# Altium PCB SL-DPT100.PcbDoc (part 2 of 3)
Units mm, origin at the board's own origin, x right, y up, seen from the top; angles counter-clockwise.
Board outline 82 x 97 mm, 4 copper layers (Top Layer, VCC, GND, Bottom Layer); 177 components, 169 nets, 599 pads, 430 vias.
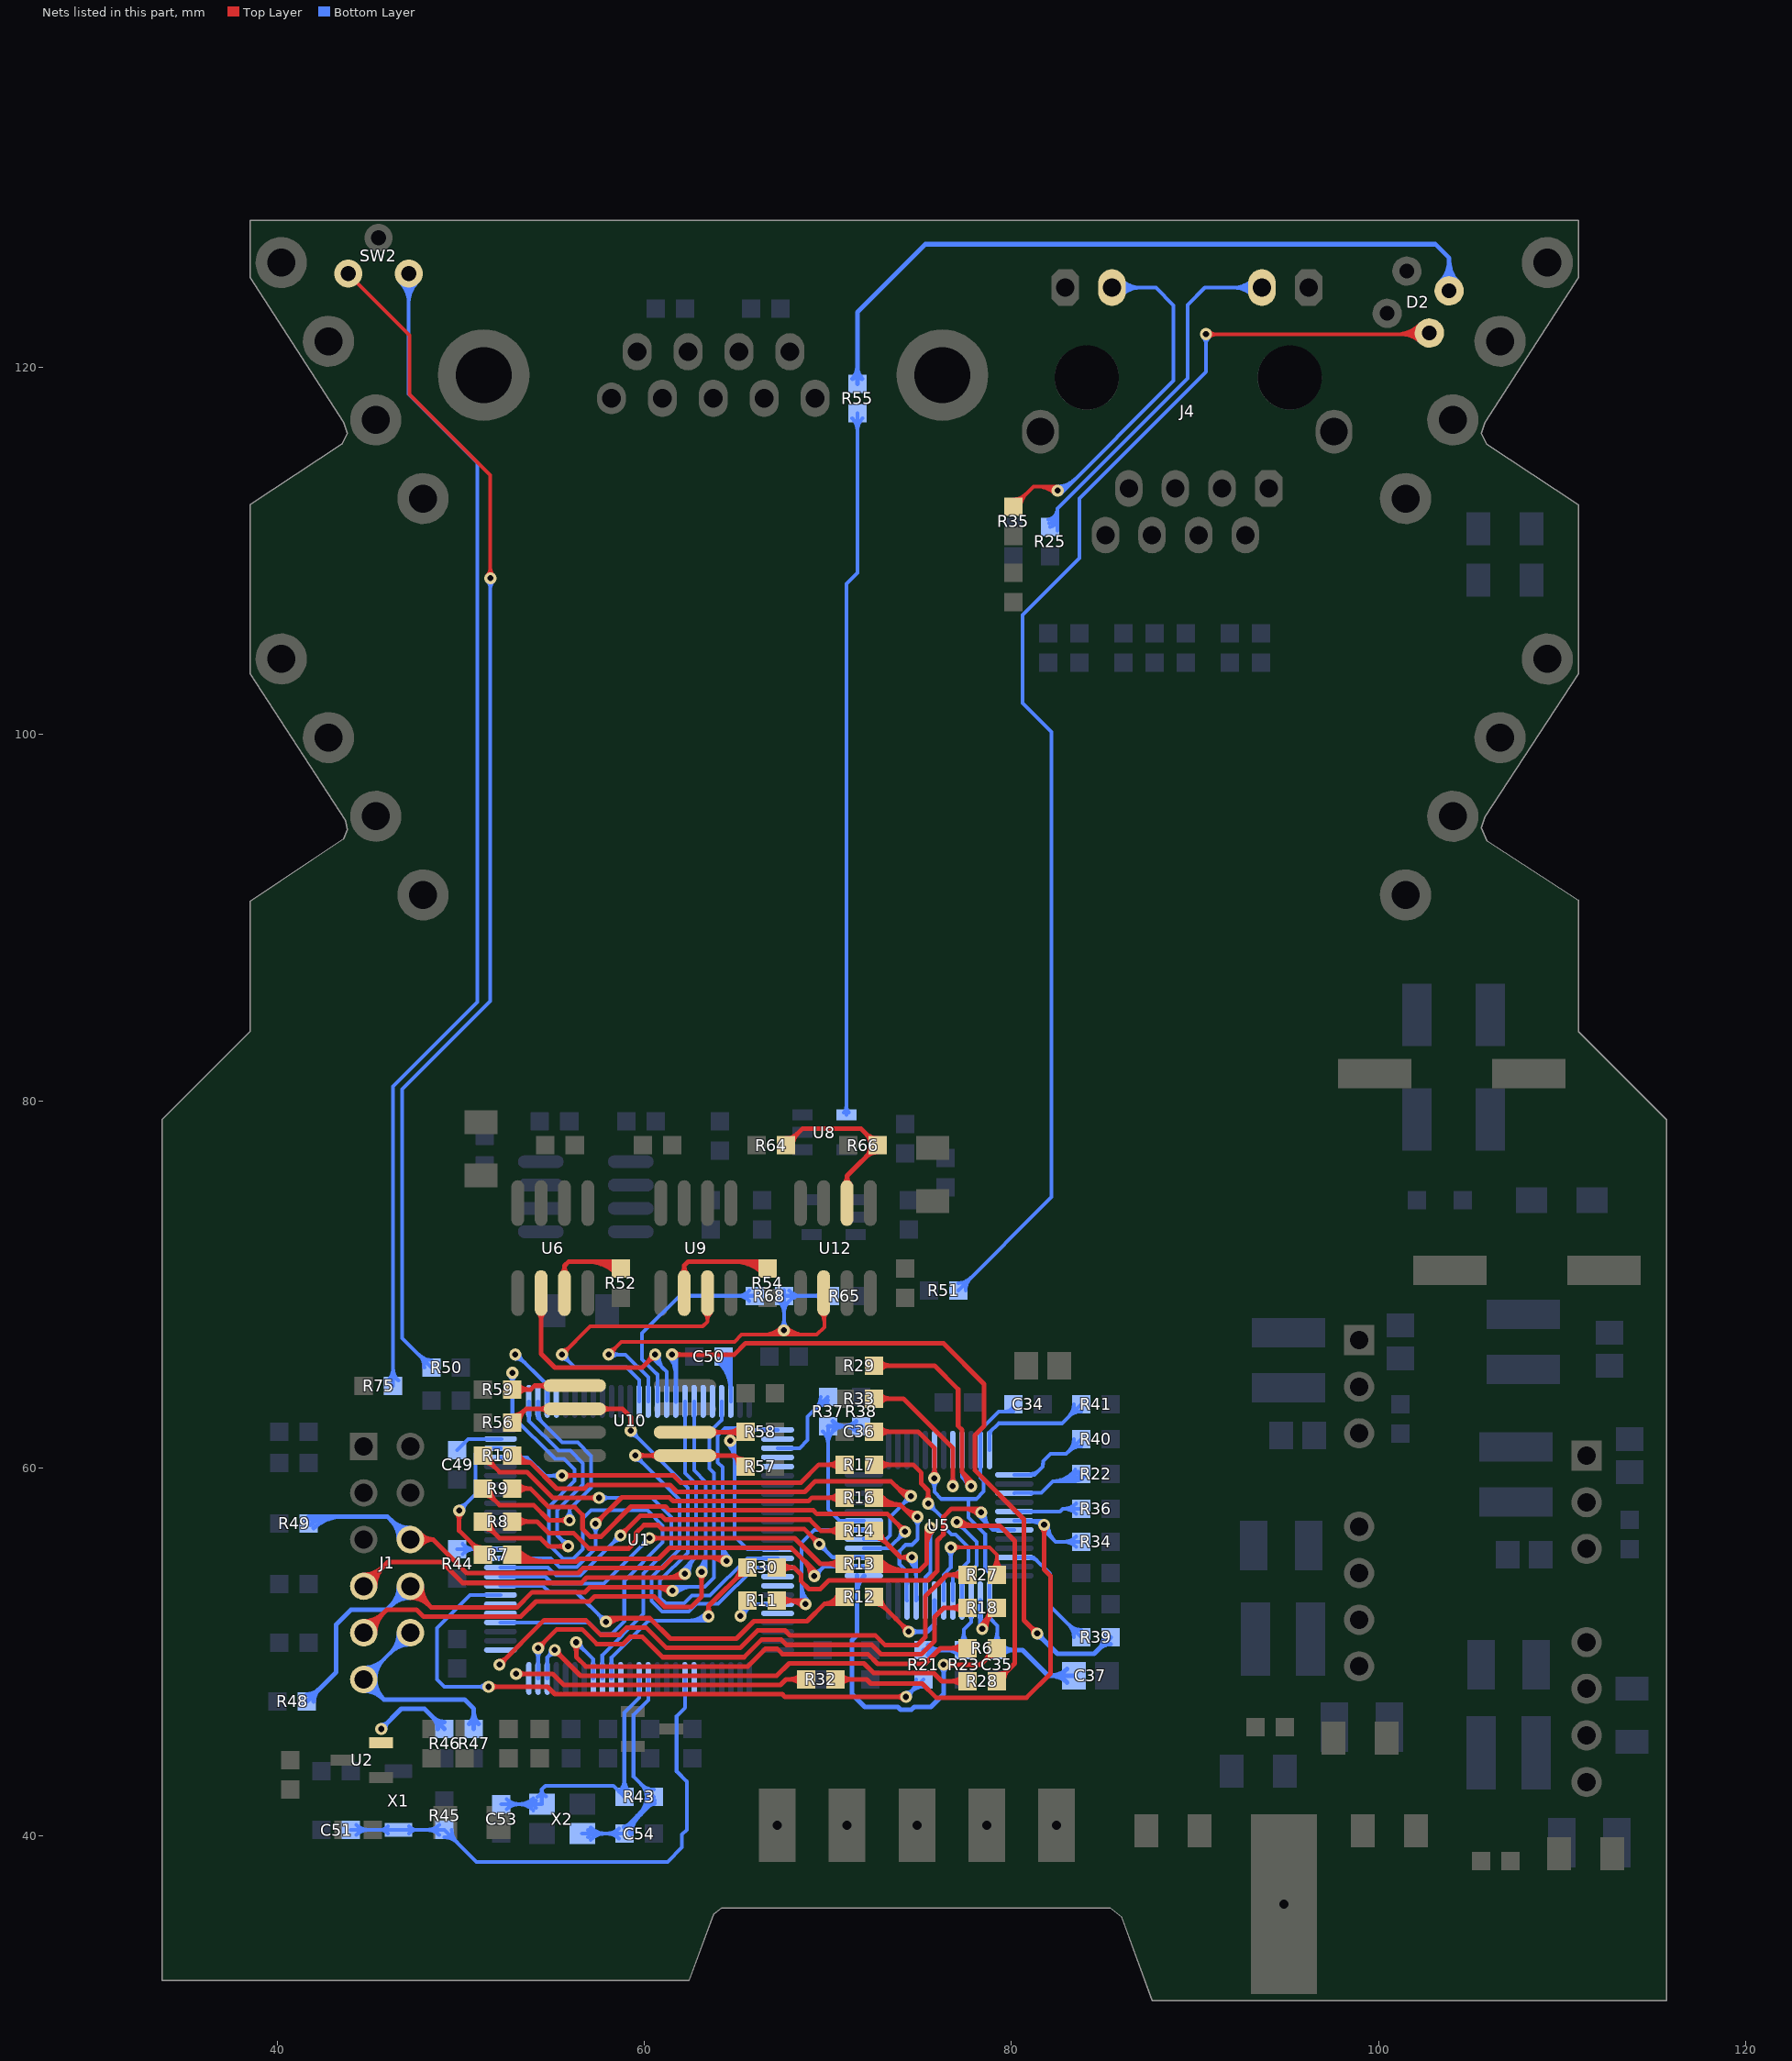
[diagram p4: the nets of this part, all layers, seen from the top]

## Via types
v1: diameter 0.66, hole 0.33, Top Layer to Bottom Layer, tented both sides, 430 vias

## Nets (pads, with @x,y where several pads share a name; then routed paths per layer and width w, separated by ;. In a path a pad name is that pad's centre, name@x,y a point inside that pad or via, vN(x,y) a via of type N, cw(c..) or ccw(c..) an arc to the next point about the centre after c; other vN are vias at no path point) (continued)
NetC34_2: C34.2 C35.2 C36.2 C37.1 U5.18 U5.23 U5.37 | length 39.2
  Top Layer w0.254: C36.2@72.5,62 74.9,62 75.8,61.1 v1@75.8,59.4 ; C36.2@72.764,61.736 cw(c73.4,61.1) 73.4,62 cw(c73.4,62.9) C36.2@72.764,62.264 ; v1@75.652,59.605 ccw(c75.294,59.963) 75.8,59.963 ; 75.8,59.941 ccw(c76.276,59.941) v1@75.939,59.605
  Bottom Layer w0.203: v1@75.634,59.3 cw(c75.233,58.899) 75.8,58.899 ; v1@75.638,59.612 ccw(c75.248,60.002) 75.8,60.002 ccw(c76.352,60.002) v1@75.962,59.612 ; 75.8,58.92 cw(c76.337,58.92) v1@75.957,59.3 ; U5.18@75.8,61 75.8,59.45 75.8,58.71 76.18,58.33 78.069,58.33 78.482,58.743 78.482,59.308 78.3,59.49 U5.23@78.3,61 78.3,62.1 79.3,63.1 C34.2@80.1,63.1 ; 77.66,58.3 77.66,57.318 78.564,56.414 78.564,54.536 78.798,54.302 78.798,52.802 U5.37@78.8,52.8 ; U5.37@78.815,51.835 79.225,51.425 C35.2@79.225,50.2 ; U5.37@78.848,51.9 ccw(c79.086,51.9) 78.918,51.732 ; C35.2@78.918,50.382 ccw(c78.178,51.122) 79.225,51.122 ; C35.2@79.062,50.238 ccw(c78.668,50.632) 79.225,50.632 ; 79.225,51.001 ccw(c80.101,51.001) C35.2@79.482,50.382 ; C34.2@79.707,63.1 ccw(c79.707,63.501) C34.2@80.108,63.5
  Bottom Layer w0.254: C35.2@79,50.1 C35.2@79.2,50.1 80.6,50.1 82,48.7 C37.1@83.4,48.7 ; C35.2@79.464,49.836 cw(c80.1,49.2) 80.1,50.1 cw(c80.1,51) C35.2@79.464,50.364 ; C37.1@83.03,48.33 ccw(c82.137,47.437) 82.137,48.7 ccw(c82.137,49.963) C37.1@83.03,49.07
  other v1: 75.796,59.461
NetC49_1: C49.1 U1.49 | length 2.6
  Bottom Layer w0.203: C49.1@49.8,61 50.4,61.6 U1.49@52.2,61.6
NetC50_1: C50.1 U1.73 | length 7.4
  Bottom Layer w0.203: C50.1@64.02,65.818 cw(c62.379,64.177) U1.73@64.7,64.177 ; C50.1@64.164,65.962 cw(c62.87,64.668) 64.7,64.668 ; C50.1@64.308,66.106 cw(c63.36,65.158) 64.7,65.158 ; C50.1@64.451,66.249 cw(c63.851,65.649) C50.1@64.7,65.649 ; U1.73@64.7,63.65 C50.1@64.7,66.1
NetD2_2: D2.2 R55.2 | length 45.3
  Bottom Layer w0.254: R55.2@71.336,119.364 ccw(c70.7,120) 71.6,120 ccw(c72.5,120) R55.2@71.864,119.364 ; R55.2@71.6,119.1 71.6,123 75.3,126.7 103.1,126.7 103.851,125.949 D2.2@103.851,124.163 ; D2.2@103.375,124.639 ccw(c102.226,125.788) 103.851,125.788 ccw(c105.476,125.788) D2.2@104.327,124.639 ; D2.2@103.555,124.46 ccw(c102.839,125.175) 103.851,125.175 ccw(c104.863,125.175) D2.2@104.147,124.46
NetD2_4: D2.4 R51.2 | length 79.7
  Top Layer w0.203: v1@90.6,121.783 102.699,121.783 D2.4@102.778,121.861 ; v1@90.762,121.638 cw(c91.111,121.289) 91.111,121.783 ; v1@90.762,121.962 ccw(c91.193,122.393) 91.193,121.783 ; 100.903,121.783 ccw(c100.903,123.736) D2.4@102.284,122.355 ; 101.28,121.783 cw(c101.28,120.364) D2.4@102.284,121.367 ; 101.393,121.783 ccw(c101.393,123.245) D2.4@102.427,122.211 ; 101.771,121.783 cw(c101.771,120.854) D2.4@102.427,121.511 ; 101.884,121.783 ccw(c101.884,122.755) D2.4@102.571,122.068
  Bottom Layer w0.203: R51.2@77.1,69.7 82.182,74.782 82.182,100.118 80.6,101.7 80.6,106.5 83.7,109.6 83.7,112.854 90.6,119.754 v1(90.6,121.8) ; R51.2@77.1,70.098 ccw(c77.1,71.06) 77.78,70.38 ccw(c78.46,69.7) R51.2@77.498,69.7 ; v1@90.438,121.638 cw(c90.048,121.248) 90.6,121.248 cw(c91.152,121.248) v1@90.762,121.638
NetD5_2: 
NetJ1_10: J1.10 J1.11 R47.1 | length 24.8
  Bottom Layer w0.203: J1.11@44.7,48.5 J1.10@47.2,51 ; J1.11@44.7,48.945 ccw(c44.7,50.02) 45.46,49.26 ccw(c46.22,48.5) J1.11@45.145,48.5 ; J1.11@44.7,49.148 ccw(c44.7,50.714) 45.807,49.607 ccw(c46.914,48.5) J1.11@45.348,48.5 ; J1.10@46.592,51.04 cw(c45.026,51.04) 46.133,49.933 cw(c47.24,48.826) J1.10@47.24,50.392 ; J1.10@46.795,51.04 cw(c45.72,51.04) 46.48,50.28 cw(c47.24,49.52) J1.10@47.24,50.595
  Bottom Layer w0.254: J1.11@44.7,47.877 cw(c44.7,46.373) 45.764,47.436 cw(c46.827,48.5) J1.11@45.323,48.5 ; J1.11@44.7,48.131 cw(c44.7,47.24) 45.33,47.87 cw(c45.96,48.5) J1.11@45.069,48.5 ; J1.11@44.7,48.5 45.8,47.4 50.2,47.4 50.7,46.9 R47.1@50.7,45.8 ; R47.1@50.436,46.064 ccw(c49.799,46.7) 50.7,46.7 ccw(c51.6,46.7) R47.1@50.964,46.064
NetJ4_10: J4.10 R25.1 | length 26.1
  Bottom Layer w0.203: R25.1@82.014,111.689 ccw(c81.879,112.295) 82.5,112.295 ; R25.1@82.058,111.491 ccw(c81.936,112.042) 82.5,112.042 ; R25.1@82.102,111.292 ccw(c81.992,111.788) R25.1@82.5,111.788 ; R25.1@82.5,111.1 82.5,112.295 ; J4.10@93.187,123.876 ccw(c92.08,122.77) 92.08,124.335 ccw(c92.08,125.9) J4.10@93.187,124.793 ; J4.10@93.33,124.02 ccw(c92.57,123.26) 92.57,124.335 ccw(c92.57,125.41) J4.10@93.33,124.65 ; J4.10@93.645,124.335 90.535,124.335 89.6,123.4 89.6,119.395 82.5,112.295
NetJ4_11: J4.11 R35.1 | length 28.5
  Top Layer w0.203: R35.1@80.1,112.4 81.2,113.5 v1@82.525,113.5 ; R35.1@80.1,112.798 ccw(c80.1,113.76) 80.78,113.08 ccw(c81.46,112.4) R35.1@80.498,112.4 ; 81.42,113.5 cw(c81.42,112.18) v1@82.353,113.113 ; 81.91,113.5 cw(c81.91,112.67) v1@82.497,113.257
  Bottom Layer w0.203: v1@82.515,113.3 ccw(c82.515,114.144) 83.112,113.548 ; v1@82.515,113.504 ccw(c82.515,114.838) 83.459,113.894 ; v1@82.67,113.105 88.83,119.265 88.83,123.37 87.865,124.335 J4.11@85.475,124.335 ; J4.11@85.79,124.02 cw(c86.55,123.26) 86.55,124.335 cw(c86.55,125.41) J4.11@85.79,124.65 ; J4.11@85.934,123.876 cw(c87.041,122.77) 87.041,124.335 cw(c87.041,125.9) J4.11@85.934,124.793
  other v1: 82.515,113.275
NetR6_1: R6.1 U5.1 | length 21.2
  Top Layer w0.254: v1(76.3,49.3) 78.3,49.3 R6.1@79.2,50.2 ; v1@76.444,49.156 cw(c76.791,48.809) 76.791,49.3 cw(c76.791,49.791) v1@76.444,49.444 ; R6.1@78.827,50.2 cw(c77.927,50.2) 78.563,49.563 cw(c79.2,48.927) R6.1@79.2,49.827
  Bottom Layer w0.254: 71.575,53.189 cw(c72.911,53.189) U5.1@71.966,54.134 ; U5.1@71.575,54.169 71.575,50.908 71.3,50.633 71.3,47.7 72,47 73.8,47 73.957,46.843 74.543,46.843 74.7,47 75.6,47 76.3,47.7 v1(76.3,49.3) ; v1@76.156,49.156 cw(c75.809,48.809) 76.3,48.809 cw(c76.791,48.809) v1@76.444,49.156
NetR7_1: R7.1 U5.2 | length 26.4
  Top Layer w0.254: R7.1@52.705,55.205 ccw(c53.391,55.891) 53.391,54.92 ; R7.1@52.81,54.93 52.82,54.92 56.29,54.92 56.441,55.071 60.758,55.071 61.362,55.675 67.993,55.675 v1@69.402,54.266 ; R7.1@52.884,55.384 ccw(c54.005,56.505) 54.005,54.92 ; R7.1@53.064,55.564 ccw(c54.618,57.118) 54.618,54.92 ; 68.704,54.964 cw(c67.867,54.128) v1@69.05,54.128 ; 69.137,54.531 cw(c68.734,54.128) v1@69.304,54.128
  Bottom Layer w0.203: v1@69.25,54.125 69.782,54.657 U5.2@71.946,54.657 ; v1@69.253,54.356 ccw(c69.253,54.906) 69.642,54.517 ; v1@69.482,54.128 cw(c70.036,54.128) 69.644,54.519
  other v1: 69.253,54.128
NetR8_1: R8.1 U5.3 | length 24.3
  Top Layer w0.254: R8.1@52.8,57.1 54.144,57.1 54.784,56.46 56.147,56.46 56.974,55.633 59.133,55.633 59.54,56.04 59.54,56.475 59.972,56.907 60.725,56.907 60.93,56.703 68.697,56.703 v1(69.525,55.875) ; R8.1@53.064,56.836 cw(c53.7,56.199) 53.7,57.1 cw(c53.7,58) R8.1@53.064,57.364 ; v1@69.322,55.875 ccw(c68.831,55.875) 69.178,56.222 ccw(c69.525,56.569) v1@69.525,56.078
  Bottom Layer w0.203: v1@69.521,55.882 69.521,55.879 70.243,55.157 U5.3@71.946,55.157 ; v1@69.525,55.646 cw(c69.525,55.095) 69.915,55.485 cw(c70.305,55.875) v1@69.754,55.875
NetR9_1: R9.1 U5.4 | length 29.9
  Top Layer w0.254: R9.1@52.8,58.9 53.774,58.9 54.79,57.885 56.2,57.885 56.623,57.462 56.623,56.697 57.037,56.283 57.633,56.283 59.265,57.915 61.143,57.915 61.347,57.711 69.202,57.711 69.401,57.512 73.238,57.512 v1(74.2,56.55) ; R9.1@53.064,58.636 cw(c53.7,57.999) 53.7,58.9 cw(c53.7,59.8) R9.1@53.064,59.164 ; v1@73.997,56.55 ccw(c73.506,56.55) 73.853,56.897 ccw(c74.2,57.244) v1@74.2,56.753
  Bottom Layer w0.203: U5.4@71.95,55.65 73.316,55.65 v1@74.22,56.555 ; 73.798,56.133 ccw(c73.381,56.55) v1@73.971,56.55 ; 73.837,56.171 cw(c74.2,55.808) v1@74.2,56.321
NetR10_1: R10.1 U5.5 | length 30.9
  Top Layer w0.254: R10.1@52.873,60.327 53.773,60.327 ; R10.1@52.915,60.731 ccw(c53.442,60.872) 53.442,60.327 ; R10.1@53.16,60.797 ccw(c53.773,60.962) 53.773,60.327 ; 73.682,59.038 ccw(c74.515,59.872) v1@74.515,58.693 ; 74.115,58.605 ccw(c74.515,59.005) v1@74.515,58.439 ; v1@74.38,58.34 73.42,59.3 69.313,59.3 68.732,58.719 61.765,58.719 61.384,59.099 56.919,59.099 56.713,58.893 55.207,58.893 53.773,60.327
  Bottom Layer w0.203: U5.5@71.95,56.15 73.175,56.15 73.372,56.347 73.372,57.342 v1@74.52,58.49 ; 74.121,58.091 ccw(c73.722,58.49) v1@74.286,58.49 ; 74.133,58.103 cw(c74.515,57.722) v1@74.515,58.261
  other v1: 74.515,58.49
NetR11_1: R11.1 U5.6 | length 13.1
  Top Layer w0.254: R11.1@67.2,52.8 v1@68.8,52.8 ; R11.1@67.464,52.536 cw(c68.101,51.899) 68.101,52.8 cw(c68.1,53.7) R11.1@67.464,53.064 ; 67.802,52.8 cw(c67.802,51.627) v1@68.631,52.456 ; 68.415,52.8 cw(c68.415,52.24) v1@68.811,52.636
  Bottom Layer w0.203: v1@68.55,52.575 68.55,55.95 69.25,56.65 U5.6@71.95,56.65 ; 68.55,53.205 ccw(c69.379,53.205) v1@68.793,52.618 ; 68.55,53.695 ccw(c69.87,53.695) v1@68.937,52.762
  other v1: 68.775,52.6
NetR12_1: R12.1 U5.43 | length 9.9
  Top Layer w0.254: R12.1@72.5,53 73.693,51.807 v1(74.4,51.1) ; 74.053,51.447 cw(c73.706,51.1) v1@74.197,51.1 ; 74.053,51.447 ccw(c74.4,51.793) v1@74.4,51.303 ; 73.137,52.363 cw(c73.774,53) 72.873,53 ccw(c73.774,53) 73.137,52.363 ; 73.137,52.363 ccw(c72.5,51.727) 72.5,52.627 cw(c72.5,51.727) 73.137,52.363
  Bottom Layer w0.254: v1(74.4,51.1) 75.4,51.1 75.8,51.5 U5.43@75.8,52.8 ; v1@74.544,50.956 cw(c74.891,50.609) 74.891,51.1 cw(c74.891,51.591) v1@74.544,51.244
NetR13_1: R13.1 U5.44 | length 15.1
  Top Layer w0.254: R13.1@72.405,54.705 ccw(c73.075,55.375) 73.075,54.427 ; R13.1@72.5,54.428 72.502,54.427 74.978,54.427 75.372,54.821 v1@75.372,56.793 ; R13.1@72.584,54.884 ccw(c73.688,55.988) 73.688,54.427 ; R13.1@72.764,55.064 ccw(c74.301,56.601) 74.301,54.427 ; 75.372,55.794 cw(c76.556,55.794) v1@75.719,56.631 ; 75.372,56.408 cw(c75.942,56.408) v1@75.539,56.811
  Bottom Layer w0.203: U5.44@75.3,52.8 75.303,52.803 75.303,54.078 75.575,54.35 v1@75.575,56.85 ; v1@75.413,56.613 cw(c75.023,56.223) 75.575,56.223 cw(c76.127,56.223) v1@75.737,56.613
  other v1: 75.575,56.775
NetR14_1: R14.1 U5.45 | length 9.7
  Top Layer w0.254: R14.1@72.5,56.227 cw(c72.5,55.327) 73.137,55.963 cw(c73.773,56.6) R14.1@72.873,56.6 ; R14.1@72.5,56.6 73.95,55.15 v1(74.575,55.15) ; v1@74.431,55.006 ccw(c74.084,54.659) 74.084,55.15 ccw(c74.084,55.641) v1@74.431,55.294
  Bottom Layer w0.203: v1@74.413,54.988 cw(c73.48,54.055) 74.8,54.055 ; v1@74.557,55.132 cw(c73.97,54.545) 74.8,54.545 ; U5.45@74.8,53.37 U5.45@74.8,52.8 ; v1@74.8,55.175 U5.45@74.8,52.8 ; U5.45@74.848,52.989 74.847,52.988 74.847,52.847 U5.45@74.8,52.8
NetR16_1: R16.1 U5.46 | length 13.1
  Top Layer w0.254: R16.1@72.389,58.323 ccw(c72.953,58.713) R16.1@72.953,58.027 ; R16.1@72.598,58.468 ccw(c73.437,59.047) 73.437,58.027 ; R16.1@72.603,58.027 73.921,58.027 v1@74.736,57.212 ; R16.1@72.807,58.612 ccw(c73.921,59.38) 73.921,58.027 ; 74.065,57.883 ccw(c74.839,58.658) v1@74.869,57.563 ; 74.482,57.466 ccw(c74.861,57.846) v1@74.876,57.309
  Bottom Layer w0.203: 74.273,53.883 ccw(c74.483,53.883) U5.46@74.334,53.734 ; U5.46@74.3,52.8 74.273,52.827 74.273,54.383 73.893,54.763 73.893,55.493 74.232,55.832 74.582,55.832 74.882,56.132 v1@74.882,57.368 ; v1@74.713,57.198 cw(c74.307,56.792) 74.882,56.792 ; 74.882,56.825 cw(c75.41,56.825) v1@75.037,57.198
  other v1: 74.875,57.36
NetR17_1: R17.1 U5.41 | length 14.3
  Top Layer w0.254: R17.1@72.5,60.2 73.6,60.2 74.64,60.2 75.088,59.752 75.088,59.168 75.46,58.797 v1@75.46,58.09 ; R17.1@72.764,59.936 cw(c73.4,59.3) 73.4,60.2 cw(c73.4,61.101) R17.1@72.764,60.464 ; v1@75.316,58.229 ccw(c74.969,58.576) 75.46,58.576 ccw(c75.951,58.576) v1@75.604,58.229
  Bottom Layer w0.203: v1@75.46,57.856 cw(c75.46,57.317) 75.842,57.698 ; v1@75.46,58.08 76.257,57.283 76.257,56.863 76.736,56.384 76.96,56.384 77.657,55.687 77.657,54.916 76.8,54.059 U5.41@76.8,52.8 ; v1@75.689,58.085 ccw(c76.253,58.085) 75.854,57.686
  other v1: 75.46,58.085
NetR18_1: R18.1 U5.38 | length 7.3
  Top Layer w0.203: v1@78.2,51.35 R18.1@79.2,52.35 ; v1@78.429,51.253 cw(c79.218,51.253) 78.66,51.81 ; 78.485,51.635 ccw(c77.719,52.4) R18.1@78.802,52.4 ; 78.605,51.755 cw(c79.2,51.16) R18.1@79.2,52.002 ; v1@78.632,51.253 cw(c79.912,51.253) R18.1@79.007,52.157 ; R18.1@78.831,51.981 ccw(c78.413,52.4) R18.1@79.005,52.4
  Bottom Layer w0.254: v1@78.3,51.15 U5.38@78.3,52.8 ; U5.38@78.3,51.994 ccw(c79.145,51.994) v1@78.548,51.396
  other v1: 78.404,51.253
NetR21_1: R21.1 R23.1 U5.39 | length 10
  Bottom Layer w0.203: R23.1@77.118,50.382 ccw(c76.438,51.062) 77.4,51.062 ccw(c78.362,51.062) R23.1@77.682,50.382 ; R23.1@77.4,50.1 77.8,50.1 77.4,50.5 77.4,51.213 77.8,51.613 U5.39@77.8,52.8
  Bottom Layer w0.254: R21.1@75.2,50.1 R23.1@77.4,50.1 ; R21.1@75.464,49.836 cw(c76.101,49.2) 76.101,50.1 cw(c76.101,51) R21.1@75.464,50.364 ; R23.1@77.136,49.836 ccw(c76.5,49.2) 76.5,50.1 ccw(c76.5,51) R23.1@77.136,50.364
NetR22_2: R22.2 U5.27 | length 7.9
  Bottom Layer w0.203: U5.27@80.15,58.65 80.177,58.677 81.633,58.677 82.256,59.3 ; U5.27@81.084,58.616 cw(c81.233,58.467) 81.233,58.677 ; 82.649,59.3 ccw(c82.649,60.516) R22.2@83.641,59.813 ; 83.042,59.3 ccw(c83.042,60.237) R22.2@83.807,59.695 ; R22.2@83.435,59.3 ccw(c83.435,59.959) R22.2@83.972,59.578 ; R22.2@83.475,59.93 cw(c82.256,60.794) 82.256,59.3 ; R22.2@83.5,59.3 82.256,59.3
NetR27_1: R27.1 U5.42 | length 10.1
  Top Layer w0.203: v1@76.7,55.7 78.8,55.7 79.2,55.3 R27.1@79.2,54.2 ; v1@76.851,55.528 cw(c77.266,55.114) 77.266,55.7 ; v1@76.851,55.852 ccw(c77.217,56.217) 77.217,55.7 ; R27.1@78.918,54.482 ccw(c78.238,55.162) 79.2,55.162 ccw(c80.162,55.162) R27.1@79.482,54.482
  Bottom Layer w0.203: U5.42@76.3,52.8 76.3,54.2 76.69,54.59 v1(76.69,55.69) ; v1@76.528,55.528 cw(c76.138,55.138) 76.69,55.138 cw(c77.242,55.138) v1@76.851,55.528
NetR28_1: R28.1 U5.40 | length 20.8
  Top Layer w0.254: v1@76.973,56.877 79.348,56.877 80.175,56.05 80.175,49.375 R28.1@79.2,48.4 ; v1@76.977,57.039 ccw(c77.368,57.43) 77.368,56.877 ; v1@77.157,57.219 ccw(c77.982,58.044) 77.982,56.877 ; R28.1@79.2,48.773 ccw(c79.2,49.674) 79.837,49.037 ccw(c80.474,48.4) R28.1@79.573,48.4
  Bottom Layer w0.203: v1@77.013,56.846 cw(c77.013,56.266) 77.424,56.676 ; v1@77.013,57.087 78.11,55.99 78.11,54.728 77.3,53.918 U5.40@77.3,52.8 ; v1@77.242,57.075 ccw(c77.765,57.075) 77.395,56.705 ; U5.40@77.348,53.7 cw(c77.992,53.7) 77.537,54.155
  other v1: 77.013,57.075
NetR29_2: R29.2 U5.21 | length 16.9
  Top Layer w0.254: R29.2@72.5,65.6 75.8,65.6 77.093,64.307 77.093,62.307 77.31,62.09 77.31,59.8 v1@77.96,59.15 ; R29.2@72.764,65.336 cw(c73.4,64.699) 73.4,65.6 cw(c73.4,66.5) R29.2@72.764,65.864 ; 77.321,59.782 cw(c76.419,59.025) v1@77.597,59.025 ; 77.685,59.425 cw(c77.286,59.025) v1@77.851,59.025 ; 77.688,59.422 cw(c77.294,59.028) v1@77.851,59.025
  Bottom Layer w0.203: U5.21@77.3,61.1 77.3,59.53 v1@77.8,59.03 ; v1@77.571,59.025 ccw(c77.02,59.025) 77.41,59.416 ccw(c77.8,59.806) v1@77.8,59.254
  other v1: 77.8,59.025
NetR30_1: R30.1 U5.31 | length 21.7
  Top Layer w0.254: R30.1@67.225,54.6 68.15,54.6 68.525,54.225 68.525,53.856 68.96,53.42 69.57,53.42 70.05,53.9 75.451,53.9 75.96,54.409 75.96,56.07 76.29,56.4 76.29,57.36 76.73,57.8 v1@78.4,57.8 ; R30.1@67.464,54.336 cw(c68.1,53.7) 68.1,54.6 cw(c68.1,55.5) R30.1@67.464,54.864 ; 77.375,57.8 cw(c77.375,56.627) v1@78.204,57.456 ; 77.988,57.8 cw(c77.988,57.24) v1@78.384,57.636
  Bottom Layer w0.203: v1@78.175,57.45 78.975,56.65 U5.31@80.15,56.65 ; v1@78.373,57.596 ccw(c78.944,57.5) 78.535,57.09 ; v1@78.573,57.562 ccw(c79.422,57.42) 78.813,56.812
  other v1: 78.348,57.6
NetR32_1: R32.1 R34.1 U5.30 | length 31.9
  Top Layer w0.254: R32.1@70.4,48.5 72.1,48.5 72.332,48.268 75.132,48.268 75.896,47.504 80.817,47.504 82.125,48.812 82.125,54.137 81.775,54.487 v1(81.775,56.925) ; R32.1@70.664,48.236 cw(c71.3,47.6) 71.3,48.5 cw(c71.3,49.4) R32.1@70.664,48.764 ; v1@81.631,56.781 cw(c81.284,56.434) 81.775,56.434 cw(c82.266,56.434) v1@81.919,56.781
  Bottom Layer w0.203: U5.30@80.15,57.15 v1@81.75,57.15 ; U5.30@80.935,57.115 cw(c80.935,55.785) v1@81.875,56.725 ; U5.30@81.17,57.15 cw(c81.17,56.32) v1@81.757,56.907 ; v1@81.675,56.725 82.4,56 R34.1@83.8,56 ; v1@81.8,56.924 ccw(c82.536,56.905) 82.016,56.384 ; v1@82.004,56.919 ccw(c83.187,56.887) 82.35,56.05 ; R34.1@83.518,55.718 ccw(c82.838,55.038) 82.838,56 ccw(c82.838,56.962) R34.1@83.518,56.282
NetR33_2: R33.2 U5.20 | length 12.6
  Top Layer w0.254: R33.2@72.5,63.8 74.1,63.8 76.8,61.1 v1(76.8,59.025) v1@76.8,59 ; R33.2@72.764,63.536 cw(c73.4,62.9) 73.4,63.8 cw(c73.4,64.7) R33.2@72.764,64.064 ; v1@76.656,59.169 ccw(c76.309,59.516) 76.8,59.516 ccw(c77.291,59.516) v1@76.944,59.169
  Bottom Layer w0.203: v1@76.638,59.187 ccw(c76.248,59.577) 76.8,59.577 ccw(c77.352,59.577) v1@76.962,59.187 ; v1@76.8,59 U5.20@76.8,61
NetR36_1: R36.1 U5.29 | length 5.2
  Bottom Layer w0.203: U5.29@80.15,57.65 82.639,57.65 82.789,57.8 R36.1@83.8,57.8 ; R36.1@83.518,57.518 ccw(c82.838,56.838) 82.838,57.8 ccw(c82.838,58.762) R36.1@83.518,58.082
NetR37_1: R37.1 R38.1 U5.7 | length 12.9
  Bottom Layer w0.203: R37.1@69.718,62.018 cw(c69.038,61.338) 70,61.338 cw(c70.962,61.338) R37.1@70.282,62.018 ; R37.1@70,62.3 70,57.775 70.625,57.15 U5.7@71.95,57.15
  Bottom Layer w0.254: R37.1@70,62.3 R38.1@71.8,62.3 ; R37.1@70.264,62.036 cw(c70.9,61.4) 70.9,62.3 cw(c70.9,63.201) R37.1@70.264,62.564 ; R38.1@71.536,62.036 ccw(c70.9,61.4) 70.9,62.3 ccw(c70.9,63.201) R38.1@71.536,62.564
NetR39_1: R39.1 U5.34 | length 8.4
  Bottom Layer w0.203: U5.34@80.15,55.15 81.208,55.15 82.1,54.258 82.1,52.5 R39.1@83.8,50.8 ; U5.34@81.05,55.102 cw(c81.05,54.603) 81.402,54.956 ; R39.1@83.402,50.8 ccw(c82.44,50.8) 83.12,51.48 ccw(c83.8,52.16) R39.1@83.8,51.198
NetR40_1: R40.1 U5.25 | length 6.6
  Bottom Layer w0.203: U5.25@80.15,59.65 81.25,59.65 81.676,60.076 ; U5.25@81.05,59.698 ccw(c81.05,60.298) 81.474,59.874 ; 81.676,60.077 81.699,60.1 81.709,60.1 81.709,60.242 81.718,60.251 81.718,60.382 82.118,60.782 82.982,60.782 R40.1@83.8,61.6 ; R40.1@83.402,61.6 cw(c82.44,61.6) 83.12,60.92 cw(c83.8,60.24) R40.1@83.8,61.202
NetR41_1: R41.1 U5.24 | length 8.3
  Bottom Layer w0.203: U5.24@78.8,61 78.8,61.959 79.294,62.453 82.753,62.453 R41.1@83.8,63.5 ; U5.24@78.848,61.9 cw(c79.108,61.9) 78.924,62.083 ; R41.1@83.402,63.5 cw(c82.44,63.5) 83.12,62.82 cw(c83.8,62.14) R41.1@83.8,63.102
NetR46_2: R46.2 U2.2 | length 6.5
  Bottom Layer w0.254: v1(45.65,45.8) 46.744,46.894 48.007,46.894 R46.2@49.1,45.8 ; v1@45.65,46.003 ccw(c45.65,46.494) 45.997,46.147 ccw(c46.344,45.8) v1@45.853,45.8 ; R46.2@48.727,45.8 ccw(c47.827,45.8) 48.463,46.437 ccw(c49.1,47.073) R46.2@49.1,46.173
NetR50_2: R50.2 SW2.1 | length 68.7
  Top Layer w0.203: SW2.1@43.85,125.1 47.2,121.75 47.2,118.516 51.6,114.116 v1(51.6,108.5) ; v1@51.438,108.662 ccw(c51.048,109.052) 51.6,109.052 ccw(c52.152,109.052) v1@51.762,108.662
  Bottom Layer w0.203: R50.2@48.002,65.5 ccw(c47.04,65.5) 47.72,66.18 ccw(c48.4,66.86) R50.2@48.4,65.898 ; R50.2@48.4,65.5 46.8,67.1 46.8,80.659 51.6,85.459 v1(51.6,108.5) ; v1@51.438,108.338 cw(c51.048,107.948) 51.6,107.948 cw(c52.152,107.948) v1@51.762,108.338
NetR52_2: R52.2 U6.3 | length 9.2
  Top Layer w0.254: U6.3@55.477,70.608 ccw(c55.097,70.988) 55.635,70.988 ccw(c56.173,70.988) U6.3@55.793,70.608 ; U6.3@55.635,69.55 55.635,71.035 55.873,71.273 R52.2@58.698,71.273 ; 56.899,71.273 cw(c56.899,69.099) R52.2@58.436,70.636 ; 57.512,71.273 cw(c57.512,69.712) R52.2@58.616,70.816 ; 58.125,71.273 cw(c58.125,70.325) R52.2@58.795,70.995
NetR54_2: R54.2 U9.2 | length 10.6
  Top Layer w0.254: U9.2@62.012,70.613 ccw(c61.682,70.965) 62.165,70.965 ccw(c62.648,70.965) U9.2@62.318,70.613 ; U9.2@62.165,69.55 62.165,71.055 62.383,71.273 R54.2@66.698,71.273 ; 64.899,71.273 cw(c64.899,69.099) R54.2@66.436,70.636 ; 65.512,71.273 cw(c65.512,69.712) R54.2@66.616,70.816 ; 66.125,71.273 cw(c66.125,70.325) R54.2@66.795,70.995
NetR55_1: R55.1 U8.4 | length 40.8
  Bottom Layer w0.203: U8.4@70.86,79.39 ccw(c70.521,79.729) 71,79.729 ccw(c71.479,79.729) U8.4@71.14,79.39 ; U8.4@71,79.25 71,108.2 71.6,108.8 R55.1@71.6,117.5 ; R55.1@71.318,117.218 cw(c70.638,116.538) 71.6,116.538 cw(c72.562,116.538) R55.1@71.882,117.218
NetR64_1: R64.1 R66.2 U12.2 | length 14.9
  Top Layer w0.254: R64.1@67.7,77.6 68.6,78.5 71.8,78.5 R66.2@72.7,77.6 71.035,75.935 U12.2@71.035,74.25 ; R64.1@67.7,77.973 ccw(c67.7,78.873) 68.337,78.237 ccw(c68.973,77.6) R64.1@68.073,77.6 ; U12.2@70.877,75.508 ccw(c70.497,75.888) 71.035,75.888 ccw(c71.573,75.888) U12.2@71.193,75.508 ; R66.2@72.7,77.227 ccw(c72.7,76.326) 72.063,76.963 ccw(c71.427,77.6) 72.327,77.6 ccw(c71.427,77.6) 72.063,78.237 ccw(c72.7,78.874) R66.2@72.7,77.973
NetR75_1: R75.1 SW2.2 | length 69.8
  Bottom Layer w0.203: R75.1@46.018,64.782 ccw(c45.338,65.462) 46.3,65.462 ccw(c47.262,65.462) R75.1@46.582,64.782 ; R75.1@46.3,64.5 46.3,80.8 50.9,85.4 50.9,114.8 47.15,118.55 SW2.2@47.15,125.1 ; SW2.2@46.683,124.633 cw(c45.556,123.506) 47.15,123.506 cw(c48.744,123.506) SW2.2@47.617,124.633 ; SW2.2@46.827,124.777 cw(c46.046,123.996) 47.15,123.996 cw(c48.254,123.996) SW2.2@47.473,124.777
OSC_IN: C54.2 R43.1 U1.12 X2.1 | length 20.2
  Bottom Layer w0.203: X2.1@56.6,40.1 C54.2@58.9,40.1 ; X2.1@56.924,39.907 cw(c57.39,39.441) 57.39,40.1 ; X2.1@56.924,40.289 ccw(c57.381,40.746) 57.381,40.1 ; X2.1@57.068,39.763 cw(c57.881,38.951) 57.881,40.1 ; X2.1@57.068,40.433 ccw(c57.872,41.237) 57.872,40.1 ; C54.2@58.618,39.818 ccw(c57.938,39.138) 57.938,40.1 ccw(c57.938,41.062) C54.2@58.618,40.382 ; R43.1@60.102,42.1 ccw(c59.14,42.1) 59.82,42.78 ccw(c60.5,43.46) R43.1@60.5,42.498 ; U1.12@60.2,48.55 60.2,47.364 59.4,46.564 59.4,43.2 R43.1@60.5,42.1
  Bottom Layer w0.3: C54.2@58.9,40.45 ccw(c58.9,40.812) C54.2@59.156,40.556 ; C54.2@59,40.4 R43.1@60.5,41.9 ; C54.2@59.25,40.1 cw(c60.578,40.1) 59.639,41.039 ; 59.761,41.161 ccw(c58.822,42.1) R43.1@60.15,42.1 ; R43.1@60.244,41.644 cw(c60.5,41.388) R43.1@60.5,41.75
OSC_OUT: C53.2 R43.2 U1.13 X2.3 | length 21.4
  Bottom Layer w0.203: C53.2@52.2,41.7 54.4,41.7 54.4,42.5 ; C53.2@52.482,41.418 cw(c53.162,40.738) 53.162,41.7 cw(c53.162,42.662) C53.2@52.482,41.982 ; 53.136,41.7 cw(c53.136,40.551) X2.3@53.949,41.363 ; 53.145,41.7 ccw(c53.145,42.837) X2.3@53.949,42.033 ; 53.627,41.7 cw(c53.627,41.041) X2.3@54.092,41.507 ; 53.635,41.7 ccw(c53.635,42.346) X2.3@54.092,41.889 ; X2.3@54.173,42.109 ccw(c53.95,42.5) 54.4,42.5 ; X2.3@54.631,42.116 cw(c54.835,42.5) 54.4,42.5 ; R43.2@58.618,42.382 ccw(c57.938,43.062) 58.9,43.062 ccw(c59.862,43.062) R43.2@59.182,42.382 ; U1.13@59.7,48.55 59.7,47.505 58.9,46.705 R43.2@58.9,42.1 58.3,42.7 54.6,42.7 54.4,42.5
PA0: R28.2 U1.23 | length 28.5
  Top Layer w0.254: v1@55.11,49.897 cw(c55.11,49.406) 55.457,49.753 cw(c55.804,50.1) v1@55.313,50.1 ; v1(55.11,50.1) 56.51,48.7 67.2,48.7 67.877,49.377 71.96,49.377 72.491,48.846 75.754,48.846 76.2,48.4 R28.2@77.6,48.4 ; R28.2@77.336,48.136 ccw(c76.7,47.5) 76.7,48.4 ccw(c76.7,49.301) R28.2@77.336,48.664
  Bottom Layer w0.203: U1.23@54.7,48.55 54.7,49.7 v1@55.11,50.11 ; v1@54.881,50.1 cw(c54.33,50.1) 54.72,49.71 cw(c55.11,49.32) v1@55.11,49.871
PA1: R18.2 U1.24 | length 32
  Top Layer w0.254: v1@54.2,50.403 ccw(c54.2,50.894) 54.547,50.547 ccw(c54.894,50.2) v1@54.403,50.2 ; v1@54.205,50.205 55.227,51.227 56.595,51.227 57.393,50.429 58.831,50.429 59.223,50.82 59.875,50.82 60.987,49.708 65.42,49.708 66.373,50.661 67.452,50.661 67.728,50.385 72.378,50.385 72.888,49.875 75.088,49.875 75.8,50.587 75.8,51.9 76.3,52.4 R18.2@77.6,52.4 ; R18.2@77.336,52.136 ccw(c76.699,51.499) 76.699,52.4 ccw(c76.7,53.3) R18.2@77.336,52.664
  Bottom Layer w0.203: v1@54.038,50.038 cw(c53.648,49.648) 54.2,49.648 cw(c54.752,49.648) v1@54.362,50.038 ; U1.24@54.2,48.55 v1(54.2,50.2)
PA2: R32.2 U1.25 | length 19.7
  Top Layer w0.254: v1(53,48.8) 55,48.8 55.604,48.196 67.409,48.196 67.713,48.5 R32.2@68.712,48.5 ; v1@53.144,48.656 cw(c53.491,48.309) 53.491,48.8 cw(c53.491,49.291) v1@53.144,48.944 ; 67.9,48.5 cw(c67.9,47.6) 68.536,48.236 ccw(c67.9,47.6) 67.9,48.5 ; 67.9,48.5 ccw(c67.9,49.4) 68.536,48.764 cw(c67.9,49.4) 67.9,48.5
PA3: R27.2 U1.26 | length 34.7
  Top Layer w0.254: v1@52.095,49.503 ccw(c52.095,50.005) 52.45,49.65 ; v1@52.1,49.3 54.531,51.731 56.804,51.731 57.602,50.933 58.623,50.933 59.019,51.329 60.079,51.329 61.196,50.212 65.211,50.212 66.165,51.165 67.66,51.165 67.937,50.889 72.587,50.889 73.097,50.379 74.879,50.379 75.296,50.796 75.296,53.021 76.475,54.2 R27.2@77.6,54.2 ; v1@52.299,49.3 cw(c52.778,49.3) 52.439,49.639 ; 76.7,54.2 cw(c76.7,53.3) 77.336,53.936 ccw(c76.7,53.3) 76.7,54.2 ; 76.699,54.2 ccw(c76.699,55.101) 77.336,54.464 cw(c76.699,55.101) 76.699,54.2
  other v1: 52.095,49.3
PA4: R59.1 U1.29 U10.1 | length 40.6
  Top Layer w0.254: R59.1@52.8,64.3 53.8,64.3 54.005,64.505 U10.1@56.2,64.505 ; R59.1@53.064,64.036 cw(c53.701,63.399) 53.701,64.3 cw(c53.7,65.2) R59.1@53.064,64.564 ; U10.1@54.692,64.347 ccw(c54.312,63.967) 54.312,64.505 ccw(c54.312,65.043) U10.1@54.692,64.663
  Bottom Layer w0.203: U1.29@52.15,51.6 56.97,51.6 57.612,50.958 58.177,50.958 58.9,51.681 58.9,53.87 60.99,55.96 60.99,56.87 60.15,57.71 57.086,57.71 56.64,57.264 56.64,55.59 56.12,55.07 55.553,55.07 54.78,55.843 54.78,57.902 56.187,59.309 56.187,59.939 55.616,60.51 55.138,60.51 52.8,62.848 v1(52.8,65.2) ; v1@52.638,65.038 cw(c52.248,64.648) 52.8,64.648 cw(c53.352,64.648) v1@52.962,65.038
PA5: U1.30
PA6: U1.31
PA7: R21.2 U1.32 | length 39
  Top Layer w0.254: v1@51.5,48.093 54.707,48.093 55.108,47.692 67.508,47.692 67.65,47.55 v1(74.25,47.55) ; v1@51.644,47.956 cw(c51.973,47.627) 51.973,48.093 ; v1@51.644,48.244 ccw(c52.008,48.608) 52.008,48.093 ; v1@74.106,47.406 ccw(c73.759,47.059) 73.759,47.55 ccw(c73.759,48.041) v1@74.106,47.694
  Bottom Layer w0.203: v1@51.338,47.938 ccw(c50.948,47.548) 50.948,48.1 ccw(c50.948,48.652) v1@51.338,48.262 ; v1(51.5,48.1) 49.1,48.1 48.7,48.5 48.7,51.3 50.5,53.1 U1.32@52.15,53.1 ; v1@74.25,47.779 ccw(c74.25,48.33) 74.64,47.94 ccw(c75.03,47.55) v1@74.479,47.55 ; v1@74.3,47.6 R21.2@75.2,48.5 ; R21.2@74.802,48.5 cw(c73.84,48.5) 74.52,47.82 cw(c75.2,47.14) R21.2@75.2,48.102
PA8: R39.2 U1.67 | length 45.9
  Top Layer w0.254: v1(61.5,66.2) 64.89,66.2 65.5,66.81 76.29,66.81 78.507,64.593 78.507,62.307 78,61.8 78,59.9 80.679,57.221 80.679,51.721 v1(81.4,51) ; v1@61.644,66.056 cw(c61.991,65.709) 61.991,66.2 cw(c61.991,66.691) v1@61.644,66.344 ; v1@81.197,51 ccw(c80.706,51) 81.053,51.347 ccw(c81.4,51.694) v1@81.4,51.203
  Bottom Layer w0.254: v1@61.356,66.056 cw(c60.527,65.227) 61.7,65.227 ; v1@61.536,66.236 cw(c61.14,65.84) 61.7,65.84 ; U1.67@61.7,63.65 v1@61.7,66.24 ; v1@81.4,50.797 cw(c81.4,50.306) 81.747,50.653 cw(c82.094,51) v1@81.603,51 ; v1(81.4,51) 82.5,49.9 84.5,49.9 R39.2@85.4,50.8 ; R39.2@85.027,50.8 cw(c84.127,50.8) 84.763,50.163 cw(c85.4,49.527) R39.2@85.4,50.427
PA9: J1.7 U1.68 | length 35.2
  Top Layer w0.254: J1.7@44.7,53.58 46.02,54.9 48.95,54.9 50.092,53.758 56.554,53.758 56.842,54.046 v1@62.221,54.046 ; J1.7@44.7,53.949 ccw(c44.7,54.84) 45.33,54.21 ccw(c45.96,53.58) J1.7@45.069,53.58 ; J1.7@44.7,54.203 ccw(c44.7,55.707) 45.764,54.644 ccw(c46.827,53.58) J1.7@45.323,53.58 ; 61.219,54.046 ccw(c61.219,55.23) v1@62.056,54.393 ; 61.833,54.046 ccw(c61.833,54.616) v1@62.236,54.213
  Bottom Layer w0.203: v1@62.03,54.402 62.81,55.182 62.81,59.131 62.2,59.741 U1.68@62.2,63.65 ; v1@62.225,54.25 cw(c62.958,54.292) 62.439,54.811 ; v1@62.428,54.262 cw(c63.565,54.327) 62.76,55.132
  other v1: 62.2,54.249
PA10: J1.9 U1.69 | length 37.2
  Top Layer w0.254: J1.9@44.7,51.04 45.96,52.3 47.574,52.3 47.957,51.917 53.254,51.917 54.087,52.75 57.005,52.75 57.279,53.024 60.376,53.024 60.389,53.011 60.535,53.011 61.096,52.45 62.55,52.45 63.11,53.01 v1@63.11,54.35 ; J1.9@44.7,51.409 ccw(c44.7,52.3) 45.33,51.67 ccw(c45.96,51.04) J1.9@45.069,51.04 ; J1.9@44.7,51.663 ccw(c44.7,53.167) 45.764,52.104 ccw(c46.827,51.04) J1.9@45.323,51.04 ; v1@62.967,54.209 cw(c62.623,53.865) 63.11,53.865 ; 63.11,53.86 cw(c63.604,53.86) v1@63.255,54.209
  Bottom Layer w0.203: U1.69@62.7,63.65 62.7,59.882 63.34,59.242 v1@63.34,54.33 ; v1@62.949,54.515 ccw(c62.006,55.458) 63.34,55.458 ; v1@63.093,54.371 ccw(c62.497,54.967) 63.34,54.967
  other v1: 63.111,54.353
PA11: U1.70
PA12: U1.71
PA13: J1.8 R48.2 U1.72 | length 49.5
  Top Layer w0.254: J1.8@47.24,52.957 cw(c47.24,51.501) 48.269,52.531 ; J1.8@47.24,53.211 cw(c47.24,52.368) 47.836,52.964 ; J1.8@47.24,53.56 48.379,52.421 53.045,52.421 53.878,53.254 56.762,53.254 57.036,53.528 61.547,53.528 v1@61.55,53.525 ; J1.8@47.609,53.58 ccw(c48.548,53.58) 47.884,52.916 ; J1.8@47.863,53.58 ccw(c49.415,53.58) 48.318,52.482 ; 60.547,53.525 cw(c60.547,52.352) v1@61.376,53.181 ; 61.16,53.525 cw(c61.16,52.965) v1@61.556,53.361
  Bottom Layer w0.203: v1@61.49,53.55 63.288,53.55 63.793,54.055 63.793,59.732 63.54,59.985 63.54,61.97 64.2,62.63 U1.72@64.2,63.65 ; v1@61.538,53.307 cw(c62.125,52.72) 62.125,53.55 ; v1@61.682,53.163 cw(c62.615,52.23) 62.615,53.55
  Bottom Layer w0.254: R48.2@41.6,47.3 43.2,48.9 43.2,51.5 44,52.3 45.96,52.3 J1.8@47.24,53.58 ; R48.2@41.6,47.673 ccw(c41.6,48.573) 42.237,47.937 ccw(c42.873,47.3) R48.2@41.973,47.3 ; J1.8@46.617,53.58 cw(c45.113,53.58) 46.176,52.516 cw(c47.24,51.453) J1.8@47.24,52.957 ; J1.8@46.871,53.58 cw(c45.98,53.58) 46.61,52.95 cw(c47.24,52.32) J1.8@47.24,53.211
  other v1: 61.52,53.325
PA14: J1.6 R49.2 U1.76 | length 47.1
  Top Layer w0.254: J1.6@47.24,56.12 48.48,56.12 ; J1.6@47.74,55.748 cw(c48.48,55.198) 48.48,56.12 ; J1.6@47.74,56.492 ccw(c48.48,57.042) 48.48,56.12 ; 63.502,55.15 cw(c63.502,53.977) v1@64.331,54.806 ; 64.115,55.15 cw(c64.115,54.59) v1@64.511,54.986 ; v1@64.5,55.15 61.55,55.15 60.96,54.56 56.643,54.56 56.383,54.3 50.3,54.3 48.48,56.12
  Bottom Layer w0.203: v1@64.25,54.925 64.25,60.069 63.993,60.326 63.993,61.782 64.393,62.182 ; 64.25,55.555 ccw(c65.08,55.555) v1@64.493,54.968 ; 64.25,56.045 ccw(c65.57,56.045) v1@64.637,55.112 ; 64.368,62.157 64.393,62.182 ; U1.76@67.25,62.1 65.039,62.1 64.957,62.182 64.393,62.182
  Bottom Layer w0.254: R49.2@41.605,57.095 cw(c42.279,56.421) 42.279,57.375 ; R49.2@41.7,57.375 45.985,57.375 J1.6@47.24,56.12 ; R49.2@41.784,56.916 cw(c42.893,55.807) 42.893,57.375 ; R49.2@41.964,56.736 cw(c43.506,55.194) 43.506,57.375 ; J1.6@46.617,56.12 ccw(c45.113,56.12) 46.176,57.184 ccw(c47.24,58.247) J1.6@47.24,56.743 ; J1.6@46.871,56.12 ccw(c45.98,56.12) 46.61,56.75 ccw(c47.24,57.38) J1.6@47.24,56.489
  other v1: 64.475,54.95
PA15: U1.77
PB0: R14.2 U1.35 | length 23.7
  Top Layer w0.254: v1@58.65,56.3 59.761,57.411 60.934,57.411 61.138,57.207 68.993,57.207 69.6,56.6 R14.2@70.925,56.6 ; v1@58.69,56.543 ccw(c58.69,57.034) 59.037,56.687 ccw(c59.384,56.34) v1@58.893,56.34 ; R14.2@70.636,56.336 ccw(c70,55.7) 70,56.6 ccw(c69.999,57.501) R14.2@70.636,56.864
  Bottom Layer w0.203: U1.35@52.15,54.6 54.741,54.6 55.177,54.164 56.504,54.164 v1@58.64,56.3 ; 58.283,55.943 cw(c58.69,55.535) v1@58.69,56.111 ; 58.307,55.967 ccw(c57.934,56.34) v1@58.461,56.34
  other v1: 58.69,56.34
PB1: R16.2 U1.36 | length 24.5
  Top Layer w0.254: v1(57.33,56.99) 58.759,58.419 61.352,58.419 61.556,58.215 68.941,58.215 69.126,58.4 R16.2@70.9,58.4 ; v1@57.33,57.193 ccw(c57.33,57.684) 57.677,57.337 ccw(c58.024,56.99) v1@57.533,56.99 ; R16.2@70.636,58.136 ccw(c69.999,57.5) 69.999,58.4 ccw(c69.999,59.301) R16.2@70.636,58.664
  Bottom Layer w0.203: U1.36@52.15,55.1 54.882,55.1 55.365,54.617 56.308,54.617 57.34,55.649 v1@57.34,57 ; v1@57.168,56.828 cw(c56.754,56.414) 57.34,56.414 ; 57.34,56.462 cw(c57.858,56.462) v1@57.492,56.828
PB2: R44.2 U1.37 | length 3.8
  Bottom Layer w0.203: R44.2@49.8,55.6 U1.37@52.1,55.6 ; R44.2@50.082,55.318 cw(c50.762,54.638) 50.762,55.6 cw(c50.762,56.562) R44.2@50.082,55.882
PB3: R58.1 U1.89 U10.6 | length 15.1
  Top Layer w0.254: U10.6@62.2,61.965 R58.1@65.465,61.965 ; U10.6@63.708,61.807 cw(c64.088,61.427) 64.088,61.965 cw(c64.088,62.503) U10.6@63.708,62.123 ; 64.515,61.965 ccw(c64.515,62.985) R58.1@65.236,62.264 ; 64.684,61.965 cw(c64.684,61.184) R58.1@65.236,61.736
  Bottom Layer w0.203: v1@64.513,61.338 cw(c63.58,60.405) 64.9,60.405 ; v1@64.657,61.482 cw(c64.07,60.895) 64.9,60.895 ; v1@64.9,61.525 64.9,56.3 65.6,55.6 U1.89@67.25,55.6
  other v1: 64.675,61.5
PB4: R56.1 U1.90 U10.2 | length 31
  Top Layer w0.254: R56.1@52.8,62.5 53.535,63.235 U10.2@56.2,63.235 58.815,63.235 59.25,62.8 v1@59.25,62 ; R56.1@52.8,62.873 ccw(c52.8,63.773) 53.437,63.137 ccw(c54.073,62.5) R56.1@53.173,62.5 ; U10.2@54.692,63.077 ccw(c54.312,62.697) 54.312,63.235 ccw(c54.312,63.773) U10.2@54.692,63.393 ; U10.2@57.708,63.077 cw(c58.088,62.697) 58.088,63.235 cw(c58.088,63.773) U10.2@57.708,63.393 ; v1@59.106,62.194 ccw(c58.759,62.541) 59.25,62.541 ccw(c59.741,62.541) v1@59.394,62.194
  Bottom Layer w0.203: v1@59.25,61.821 cw(c59.25,61.27) 59.64,61.66 cw(c60.03,62.05) v1@59.479,62.05 ; v1@59.263,62.037 62.356,58.944 62.356,55.402 60.838,53.884 60.838,52.952 61.15,52.64 62.167,52.64 62.594,53.067 63.567,53.067 65.6,55.1 U1.90@67.25,55.1
  other v1: 59.25,62.05
PB5: R57.1 U1.91 U10.5 | length 28.5
  Top Layer w0.254: v1(59.5,60.7) 64.9,60.7 ; v1@59.644,60.556 cw(c59.991,60.209) 59.991,60.7 cw(c59.991,61.191) v1@59.644,60.844 ; 60.3,60.7 cw(c60.3,60.145) U10.5@60.692,60.537 ; 60.324,60.7 ccw(c60.324,61.221) U10.5@60.692,60.853 ; U10.5@63.708,60.537 cw(c64.1,60.145) 64.1,60.7 ; U10.5@63.708,60.853 ccw(c64.076,61.221) 64.076,60.7 ; R57.1@65.127,60.116 ccw(c64.35,60.149) 64.9,60.7 ; R57.1@65.484,60.473 cw(c65.451,61.25) 64.9,60.7 ; R57.1@65.5,60.1 64.9,60.7
  Bottom Layer w0.203: v1@59.5,60.471 cw(c59.5,59.92) 59.89,60.31 cw(c60.28,60.7) v1@59.729,60.7 ; v1@59.512,60.688 61.903,58.297 61.903,55.591 60.383,54.071 60.383,52.766 60.962,52.187 62.409,52.187 62.834,52.612 64.012,52.612 66,54.6 U1.91@67.25,54.6
PB6: U1.92
PB7: U1.93
PB8: R11.2 U1.95 | length 3.2
  Bottom Layer w0.203: v1@65.227,51.952 65.875,52.6 U1.95@67.25,52.6 ; v1@65.23,52.184 ccw(c65.23,52.735) 65.62,52.345 ccw(c66.01,51.955) v1@65.459,51.955
  other v1: 65.23,51.955
PB9: U1.96
PB10: R17.2 U1.47 | length 22.8
  Top Layer w0.254: v1@55.51,59.609 61.587,59.609 61.973,59.223 66.156,59.223 66.157,59.224 66.443,59.224 66.444,59.223 68.523,59.223 69.5,60.2 R17.2@70.9,60.2 ; v1@55.649,59.456 cw(c56.017,59.088) 56.017,59.609 ; v1@55.649,59.744 ccw(c55.974,60.069) 55.974,59.609 ; R17.2@70.636,59.936 ccw(c69.999,59.3) 69.999,60.2 ccw(c69.999,61.101) R17.2@70.636,60.464
  Bottom Layer w0.203: U1.47@52.15,60.6 53.6,60.6 54.6,59.6 v1@55.51,59.6 ; v1@55.343,59.438 ccw(c54.953,59.048) 54.953,59.6 ccw(c54.953,60.152) v1@55.343,59.762
  other v1: 55.505,59.6
PB11: R7.2 U1.48 | length 10.9
  Top Layer w0.254: v1@49.756,57.556 cw(c49.409,57.209) 49.9,57.209 cw(c50.391,57.209) v1@50.044,57.556 ; v1(49.9,57.7) 49.9,56.6 R7.2@51.2,55.3 ; R7.2@50.827,55.3 ccw(c49.927,55.3) 50.563,55.937 ccw(c51.2,56.573) R7.2@51.2,55.673
  Bottom Layer w0.203: v1(49.9,57.7) 50.8,58.6 50.8,60.8 51.1,61.1 U1.48@52.15,61.1 ; v1@49.9,57.929 ccw(c49.9,58.48) 50.29,58.09 ccw(c50.68,57.7) v1@50.129,57.7
PB12: R8.2 U1.51 | length 18.6
  Top Layer w0.254: R8.2@51.2,56.727 cw(c51.2,55.826) 51.837,56.463 cw(c52.473,57.1) R8.2@51.573,57.1 ; R8.2@51.2,57.1 52.1,56.2 54.331,56.2 54.781,55.75 v1@55.83,55.75 ; 55.34,55.75 ccw(c55.34,56.247) v1@55.691,55.896 ; 55.349,55.75 cw(c55.349,55.266) v1@55.691,55.608
  Bottom Layer w0.203: U1.51@53.7,63.65 53.7,62.589 55.326,60.963 55.955,60.963 56.64,60.278 56.64,59.121 55.233,57.714 55.233,56.357 v1@55.84,55.75 ; 55.443,56.147 cw(c55.047,55.752) v1@55.606,55.752 ; 55.45,56.14 ccw(c55.835,56.525) v1@55.835,55.981
  other v1: 55.835,55.752
PB13: R9.2 U1.52 | length 17.5
  Top Layer w0.254: R9.2@51.2,58.527 cw(c51.2,57.626) 51.837,58.263 cw(c52.473,58.9) R9.2@51.573,58.9 ; R9.2@51.2,58.9 52.1,58 53.957,58 54.787,57.17 v1@55.9,57.17 ; v1@55.771,57.026 ccw(c55.424,56.679) 55.424,57.17 ccw(c55.424,57.661) v1@55.771,57.314
  Bottom Layer w0.203: U1.52@54.2,63.65 54.2,62.73 55.514,61.416 56.354,61.416 57.093,60.677 57.093,58.933 55.92,57.76 v1@55.92,57.17 ; U1.52@54.248,62.9 ccw(c54.776,62.9) 54.403,62.527 ; v1@55.753,57.332 ccw(c55.351,57.734) 55.92,57.734 ; 55.92,57.71 ccw(c56.455,57.71) v1@56.077,57.332
  other v1: 55.915,57.17
PB14: pad.1 U1.53 | length 4.5
  Bottom Layer w0.203: pad.1@52.96,65.971 cw(c52.96,65.23) 53.485,65.754 ; pad.1@52.994,66.244 54.7,64.539 U1.53@54.7,63.65 ; pad.1@53.189,66.2 ccw(c53.551,66.2) 53.295,65.944 ; 54.519,64.719 cw(c54.2,64.4) U1.53@54.652,64.4
PB15: U1.54
PC0: U1.15
PC1: R30.2 U1.16 | length 14.6
  Top Layer w0.254: v1@63.346,52.074 ccw(c62.999,52.421) 63.49,52.421 ccw(c63.981,52.421) v1@63.634,52.074 ; v1(63.49,51.93) 63.49,52.49 R30.2@65.538,54.538 ; R30.2@65.227,54.6 cw(c64.327,54.6) 64.963,53.963 cw(c65.6,53.327) R30.2@65.6,54.227
  Bottom Layer w0.203: U1.16@58.2,48.55 58.2,49.69 60.211,51.701 v1@63.505,51.701 ; 62.385,51.701 ccw(c62.385,53.035) v1@63.328,52.092 ; 62.876,51.701 ccw(c62.876,52.544) v1@63.472,51.948
PC2: R10.2 U1.17 | length 25
  Top Layer w0.254: R10.2@51.2,60.327 cw(c51.2,59.427) 51.837,60.063 cw(c52.473,60.7) R10.2@51.573,60.7 ; R10.2@51.2,60.7 52.1,59.8 53.587,59.8 54.998,58.389 v1@57.52,58.389 ; 57.027,58.389 ccw(c57.027,58.89) v1@57.381,58.536 ; 57.042,58.389 cw(c57.042,57.909) v1@57.381,58.248
  Bottom Layer w0.203: v1@57.52,58.39 60.41,58.39 61.45,57.35 61.45,55.779 59.93,54.259 59.93,52.061 57.7,49.831 U1.17@57.7,48.55 ; v1@57.687,58.23 cw(c58.072,57.845) 58.072,58.39 ; v1@57.687,58.554 ccw(c58.082,58.949) 58.082,58.39
  other v1: 57.525,58.392
PC3: R6.2 U1.18 | length 28.8
  Top Layer w0.254: v1@56.136,50.376 cw(c55.789,50.029) 56.28,50.029 cw(c56.771,50.029) v1@56.424,50.376 ; v1(56.28,50.52) 56.28,49.72 56.796,49.204 65.629,49.204 65.65,49.225 66.582,50.157 67.243,50.157 67.519,49.881 72.169,49.881 72.7,49.35 75.276,49.35 76.126,50.2 R6.2@77.6,50.2 ; R6.2@77.336,49.936 ccw(c76.699,49.299) 76.699,50.2 ccw(c76.7,51.1) R6.2@77.336,50.464
  Bottom Layer w0.203: v1@56.275,50.525 57.2,49.6 U1.18@57.2,48.55 ; v1@56.28,50.291 cw(c56.28,49.74) 56.67,50.13 cw(c57.06,50.52) v1@56.509,50.52
PC4: R12.2 U1.33 | length 25.5
  Top Layer w0.254: v1@57.833,51.833 60.288,51.833 61.405,50.716 65.003,50.716 65.957,51.67 68.857,51.67 69.814,52.627 ; v1@57.859,51.676 cw(c58.238,51.297) 58.238,51.833 ; v1@58.039,51.496 cw(c58.852,50.683) 58.852,51.833 ; 70.184,52.627 ccw(c70.184,53.275) R12.2@70.789,53.043 ; R12.2@70.552,53.134 cw(c69.814,53.417) 69.814,52.627 ; R12.2@70.554,52.627 ccw(c70.554,53.133) R12.2@71.026,52.952 ; R12.2@71,52.627 69.814,52.627
  Bottom Layer w0.203: U1.33@52.15,53.6 54.459,53.6 54.802,53.257 56.273,53.257 v1@57.89,51.64 ; 57.496,52.034 ccw(c57.895,52.433) v1@57.895,51.869 ; 57.508,52.022 cw(c57.127,51.64) v1@57.666,51.64
  other v1: 57.895,51.64
PC5: R13.2 U1.34 | length 23.6
  Top Layer w0.254: v1@60.27,56.196 68.185,56.196 69.581,54.8 R13.2@70.9,54.8 ; v1@60.409,56.056 cw(c60.746,55.719) 60.746,56.196 ; v1@60.409,56.344 ccw(c60.765,56.7) 60.765,56.196 ; R13.2@70.636,54.536 ccw(c69.999,53.9) 69.999,54.8 ccw(c69.999,55.701) R13.2@70.636,55.064
  Bottom Layer w0.203: U1.34@52.15,54.1 54.6,54.1 54.989,53.711 57.781,53.711 v1@60.26,56.19 ; 59.871,55.801 ccw(c59.472,56.2) v1@60.036,56.2 ; 59.883,55.813 cw(c60.265,55.432) v1@60.265,55.971
  other v1: 60.265,56.2
PC6: pad.2 U1.63 U9.3 | length 18.8
  Top Layer w0.203: pad.2@55.5,66.2 57.042,67.742 63.172,67.742 63.43,68 U9.3@63.43,69.46 ; pad.2@55.5,66.429 ccw(c55.5,66.98) 55.89,66.59 ccw(c56.28,66.2) pad.2@55.729,66.2 ; U9.3@63.259,68.474 cw(c62.847,68.062) 63.43,68.062 ; 63.43,68.038 cw(c64.047,68.038) U9.3@63.611,68.474
  Bottom Layer w0.203: pad.2@55.5,65.971 cw(c55.5,65.419) 55.89,65.81 cw(c56.28,66.2) pad.2@55.729,66.2 ; pad.2@55.5,66.2 56.19,65.51 59.008,65.51 59.7,64.818 U1.63@59.7,63.65
PC7: pad.3 R65.1 R68.2 U1.64 U12.6 | length 34.3
  Top Layer w0.203: pad.3@58.04,66.2 58.74,66.9 64.9,66.9 65.289,67.289 69.389,67.289 69.8,67.7 U12.6@69.8,69.4 ; pad.3@58.04,66.429 ccw(c58.04,66.98) 58.43,66.59 ccw(c58.82,66.2) pad.3@58.269,66.2 ; 66.494,67.289 ccw(c66.494,68.624) v1@67.438,67.68 ; 66.985,67.289 ccw(c66.985,68.133) v1@67.582,67.536 ; v1@67.618,67.536 ccw(c68.215,68.133) 68.215,67.289 ; v1@67.762,67.68 ccw(c68.706,68.624) 68.706,67.289 ; U12.6@69.589,68.474 cw(c69.081,67.966) 69.8,67.966 ; 69.8,68.135 cw(c70.28,68.135) U12.6@69.941,68.474
  Bottom Layer w0.203: pad.3@58,66.2 58.959,66.2 60.2,64.959 U1.64@60.2,63.65 ; pad.3@58.202,66.038 cw(c58.592,65.648) 58.592,66.2 cw(c58.592,66.752) pad.3@58.202,66.362 ; R68.2@67.318,69.118 cw(c66.638,68.438) 67.6,68.438 cw(c68.562,68.438) 67.882,69.118 cw(c68.562,68.438) 68.562,69.4 cw(c68.562,70.362) R68.2@67.882,69.682 ; v1@67.438,67.68 ccw(c67.048,68.07) 67.6,68.07 ccw(c68.152,68.07) v1@67.762,67.68 ; v1(67.6,67.518) R68.2@67.6,69.7 ; R68.2@67.6,69.4 R65.1@70.1,69.4 ; R65.1@69.818,69.118 ccw(c69.138,68.438) 69.138,69.4 ccw(c69.138,70.362) R65.1@69.818,69.682
PC8: R68.1 U1.65 | length 12.6
  Bottom Layer w0.203: U1.65@60.7,63.65 60.7,65.109 60.653,65.156 60.644,65.156 59.87,65.93 59.87,67.37 61.9,69.4 R68.1@66,69.4 ; R68.1@65.718,69.118 ccw(c65.038,68.438) 65.038,69.4 ccw(c65.038,70.362) R68.1@65.718,69.682
PC9: pad.4 U1.66 U6.2 | length 15.8
  Top Layer w0.254: U6.2@54.207,68.492 cw(c53.827,68.112) 54.365,68.112 cw(c54.903,68.112) U6.2@54.523,68.492 ; U6.2@54.365,69.55 54.365,66.235 55.107,65.493 59.873,65.493 pad.4@60.58,66.2 ; pad.4@60.377,66.2 cw(c59.886,66.2) 60.233,65.853 cw(c60.58,65.506) pad.4@60.58,65.997
  Bottom Layer w0.203: pad.4@60.41,66.045 61.2,65.255 U1.66@61.2,63.7 ; pad.4@60.605,66.195 ccw(c61.165,66.095) 60.763,65.692 ; pad.4@60.805,66.16 ccw(c61.631,66.011) 61.037,65.418
PC10: R37.2 U1.78 | length 6.6
  Bottom Layer w0.203: U1.78@67.25,61.1 68.45,61.1 68.886,61.536 68.886,62.811 R37.2@69.975,63.9 ; 69.277,63.202 cw(c70,62.479) R37.2@70,63.502 ; 69.338,63.263 ccw(c68.7,63.9) R37.2@69.602,63.9 ; R37.2@69.624,63.549 cw(c70,63.173) R37.2@70,63.705
PC11: U1.79
PC12: U1.80
PC13: U1.7
PC14: C51.2 R45.2 U1.8 X1.2 | length 35.4
  Bottom Layer w0.203: C51.2@44,40.3 R45.2@49.1,40.3 50.848,38.552 61.252,38.552 62.044,39.344 62.044,40.045 62.3,40.301 62.3,42.936 61.748,43.487 61.748,46.507 62.2,46.959 U1.8@62.2,48.55 ; C51.2@44.282,40.018 cw(c44.962,39.338) 44.962,40.3 cw(c44.962,41.262) C51.2@44.282,40.582 ; X1.2@46.021,40.107 ccw(c45.554,39.64) 45.554,40.3 ccw(c45.554,40.96) X1.2@46.021,40.493 ; X1.2@47.158,40.107 cw(c47.624,39.64) 47.624,40.3 cw(c47.624,40.96) X1.2@47.158,40.493 ; R45.2@48.818,40.018 ccw(c48.138,39.338) 48.138,40.3 ccw(c48.138,41.262) R45.2@48.818,40.582 ; R45.2@49.1,39.902 cw(c49.1,38.94) 49.78,39.62 cw(c50.46,40.3) R45.2@49.498,40.3